# Altium PCB PCB1.PcbDoc
Units mm, origin at the board's own origin, x right, y up, seen from the top; angles counter-clockwise.
Board outline 50.81 x 50.81 mm, 2 copper layers (Top Layer, Bottom Layer); 55 components, 53 nets, 231 pads, 76 vias.
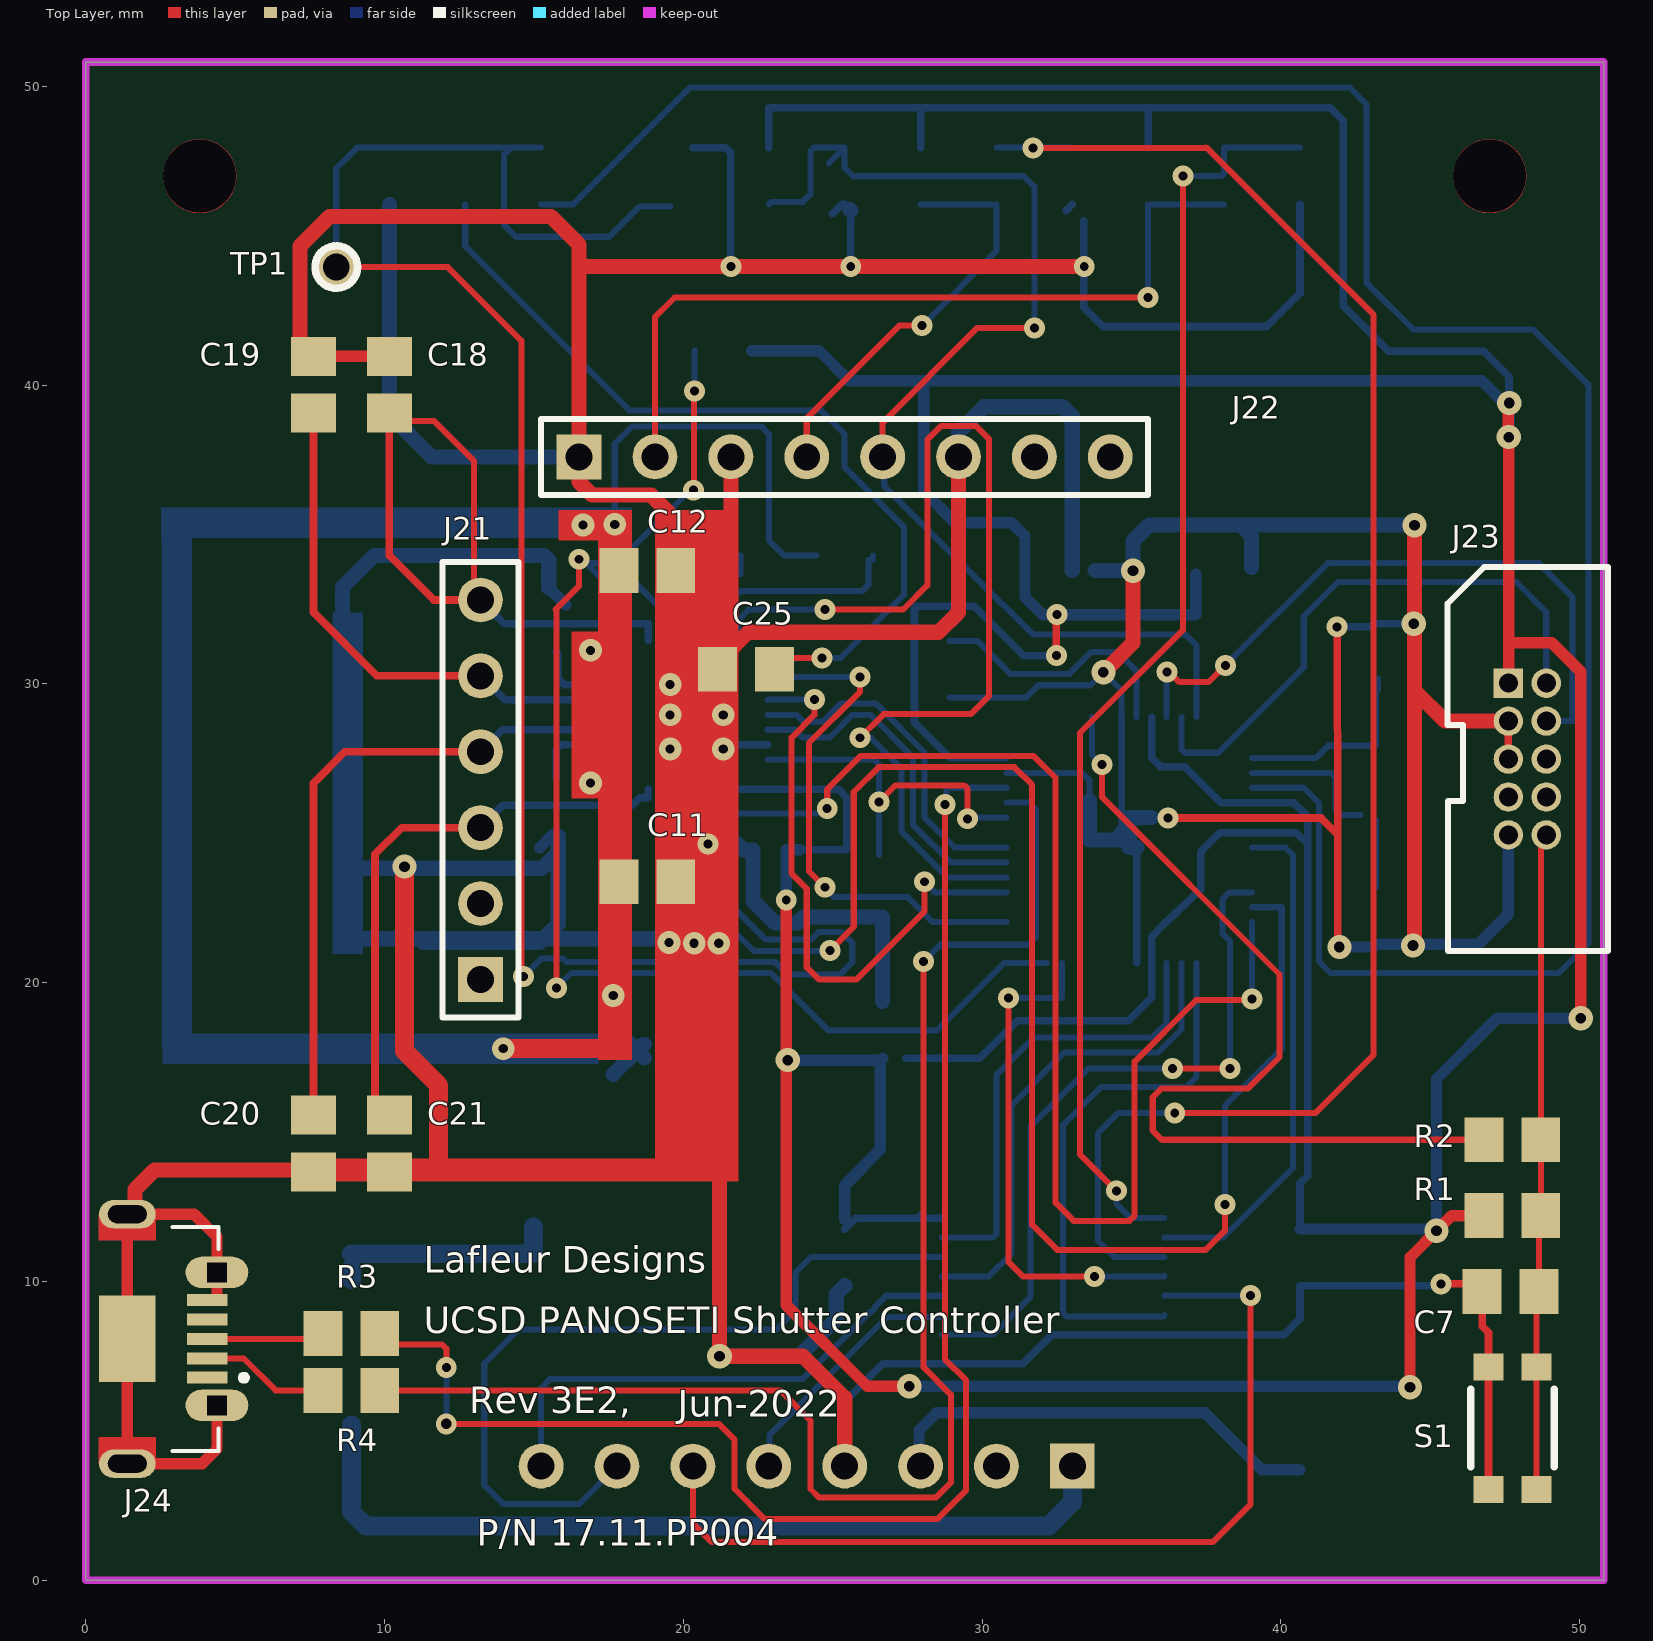
[diagram p0: Top Layer view]
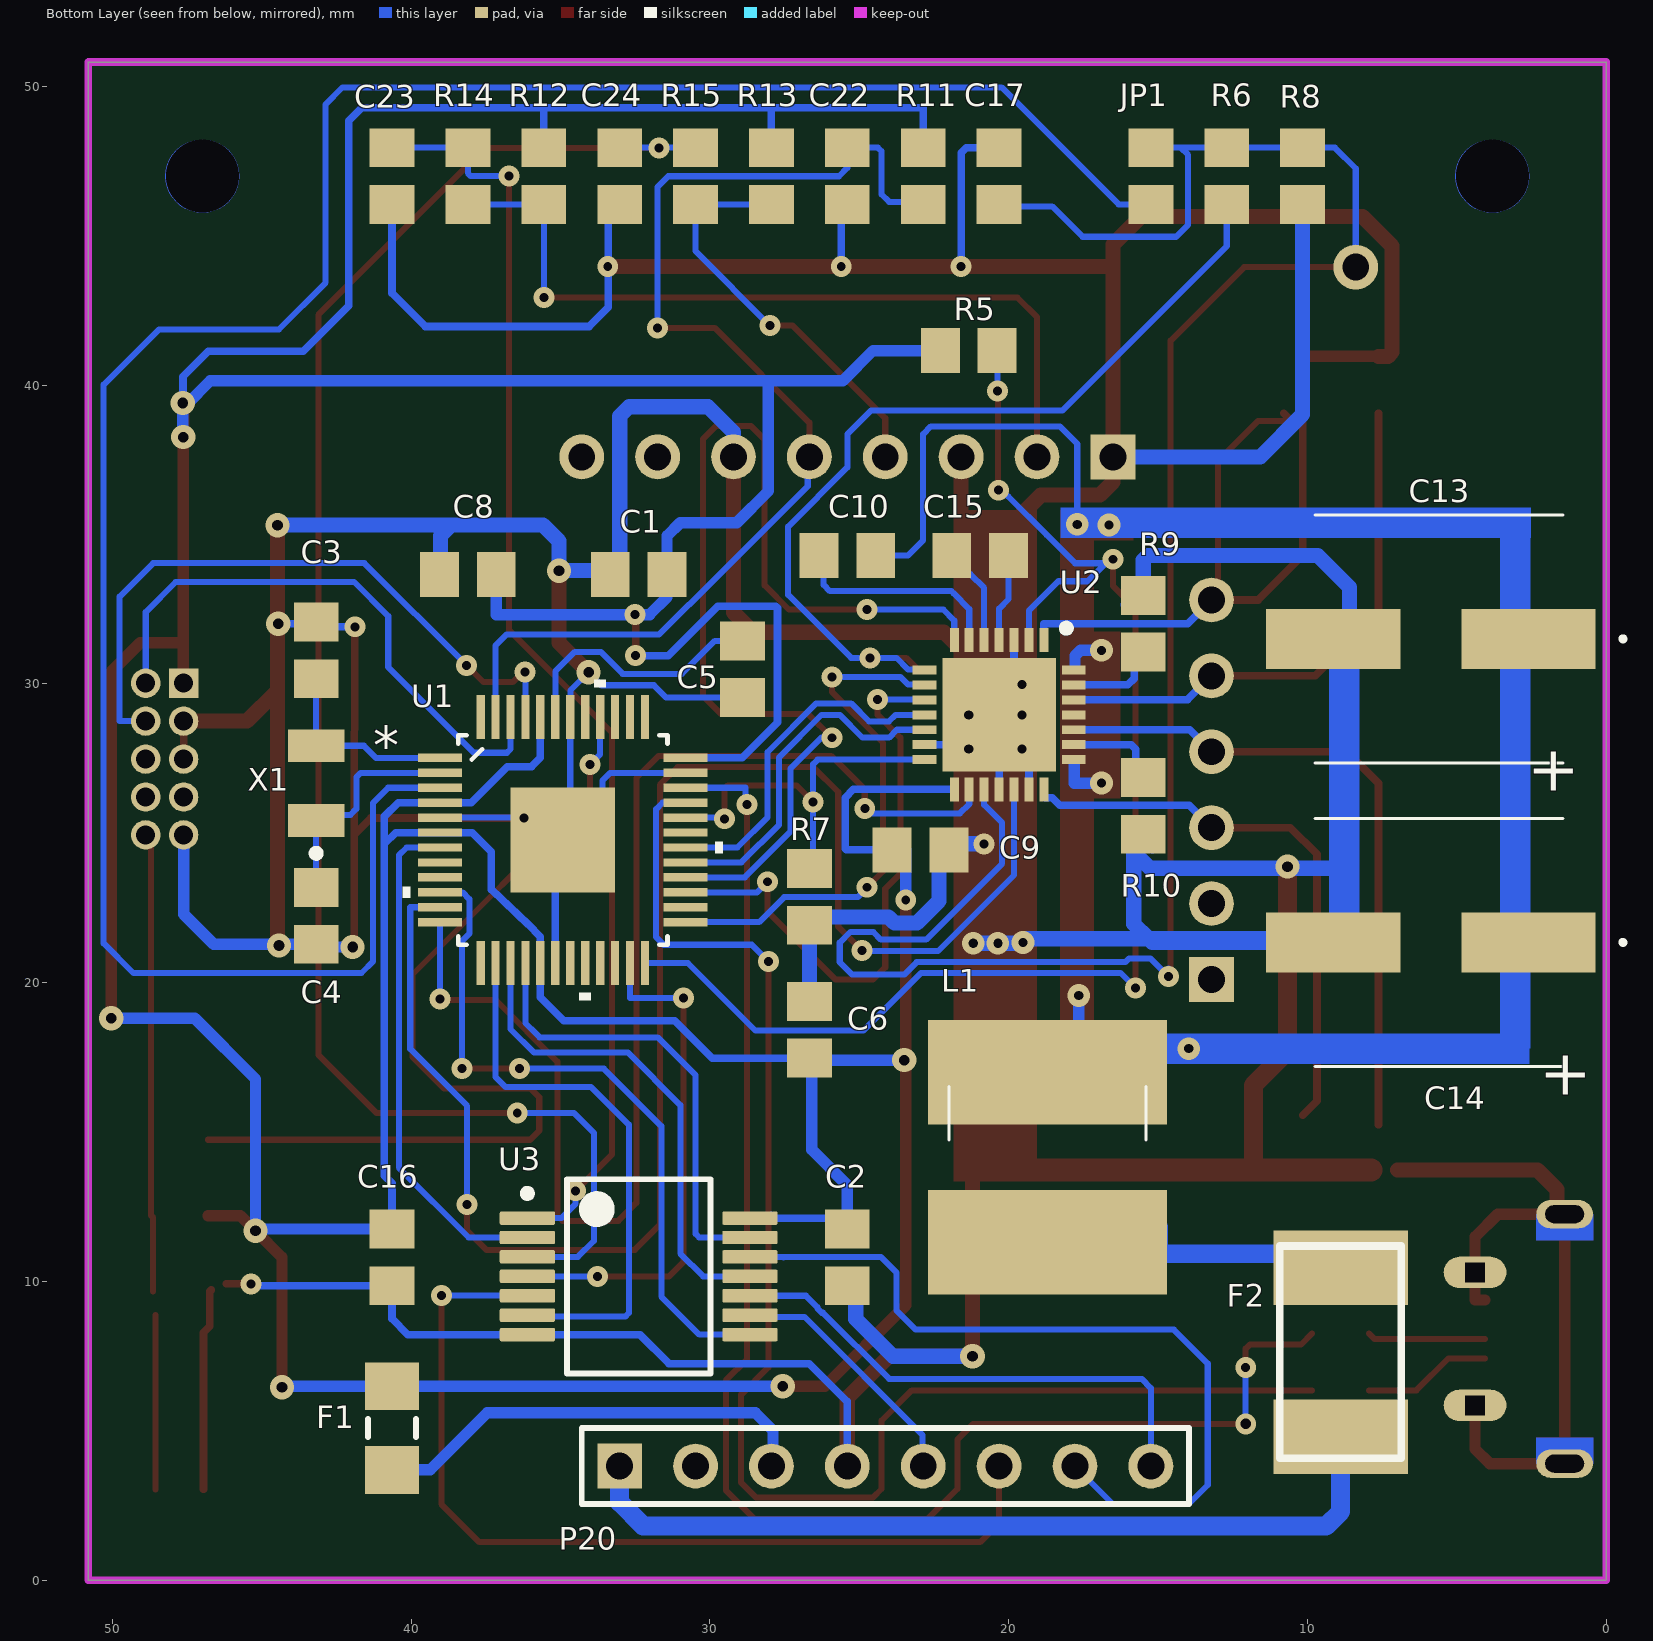
[diagram p1: Bottom Layer view, seen from below]

## Layer stack, top to bottom
Top Solder: solder mask 0.0102, Solder Resist, Dk 3.5
Top Layer: signal copper 0.0356
Dielectric 1: dielectric 0.32, FR-4, Dk 4.8
Bottom Layer: signal copper 0.0356
Bottom Solder: solder mask 0.0102, Solder Resist, Dk 3.5

## Board outline
-0.007,0.006 ccw(c0,0.006) 0,0 50.8,0 ccw(c50.8,0.006) 50.807,0.006 50.807,50.806 ccw(c50.8,50.806) 50.8,50.813 0,50.813 ccw(c0,50.806) -0.007,50.806

## Design rules (kind name [scope] priority, off if disabled: settings)
Clearance [All] p1: gap=0.152 ignorepadtopadclearanceinfootprint=TRUE except(0: Arc-Hole Track-Hole SMDPad-Hole THPad-Hole Via-Hole Fill-Hole Poly-Hole Region-Hole Text-Hole)
ComponentClearance [All] p1: gap=0.051 collisioncheckmode=3 verticalgap=0.051 showdistances=TRUE
HoleSize [All] p1: absolutevalues=TRUE maxlimit=4 minlimit=0.3 maxpercent=80.000 minpercent=20.000
HoleToHoleClearance [All] p1: gap=0.102 allowstackedmicrovias=TRUE
MinimumAnnularRing [All] p1: minimumring=0.152
MinimumSolderMaskSliver [All] p1: minsoldermaskwidth=0.076
PolygonConnect [All] p1: connectstyle=Relief reliefconductorwidth=0.254 reliefentries=4 polygonreliefangle="90 Angle" airgapwidth=0.254
RoutingPriority RoutingPriority_2 [All] p1: routingpriority=3
RoutingPriority RoutingPriority_1 [InNet('GND')] p2: routingpriority=3
RoutingPriority [InNet('+3.3V')] p3: routingpriority=2
RoutingVias [All] p1: holewidth=0.254 width=0.559 viastyle="Through Hole" minholewidth=0.254 minwidth=0.559 maxholewidth=0.711 maxwidth=1.27
SilkToSilkClearance [All] p1: silktosilkclearance=0.051
SilkToSolderMaskClearance [IsPad] p1: minsilkscreentomaskgap=0.152 clearancetoexposedcopper=TRUE
SolderMaskExpansion [All] p1: expansion=0.102
Width GND [InNet('GND')] p1: maxlimit=2.54 minlimit=0.152 preferedwidth=0.508
Width +3.3v [InNet('+3.3V')] p2: maxlimit=0.508 minlimit=0.203 preferedwidth=0.381
Width C10-2(24V) [InNet('NetC10_2')] p3: maxlimit=2.54 minlimit=0.203 preferedwidth=0.508
Width Routing [All] p4: maxlimit=0.762 minlimit=0.203 preferedwidth=0.203
23 further rules are at their usual default settings.

## Classes and differential pairs
component class Sheet2: C9 C10 C11 C12 C13 C14 C15 C16 C17 C18 C19 C20 C21 C22 C23 C24 C25 F2 J21 J22 JP1 L1 P20 R5 R6 R7 R8 R9 R10 R11 R12 R13 R14 R15 TP1 U2 U3
component class Sheet1: C1 C2 C3 C4 C5 C6 C7 C8 F1 J23 J24 R1 R2 R3 R4 S1 U1 X1

## Components (designator, comment, footprint, x,y, rotation, side; value= is the part's Value field where it differs from the comment)
C1 "10uf" 6-0805 32.385,33.661 r0 bottom
C2 ".1uf" 6-0805 25.4,10.801 r270 bottom
C3 "12PF" 6-0805 43.18,31.121 r90 bottom locked
C4 "12PF" 6-0805 43.18,22.231 r270 bottom locked
C5 "1uf" 6-0805 28.905,30.486 r270 bottom
C6 ".1uf" 6-0805 26.67,18.421 r90 bottom
C7 "1uf" 6-0805 47.686,9.658 r180 top
C8 ".1uf" 6-0805 38.1,33.661 r0 bottom
C9 ".1uf" 6-0805 22.951,24.441 r180 bottom
C10 ".1uf" 6-0805 25.4,34.296 r180 bottom
C11 ".1uf" 6-0805 18.796,23.374 r0 top
C12 ".1uf" 6-0805 18.796,33.788 r0 top locked
C13 "100uf" SMD_Lytic_F 5.588,31.502 r0 bottom locked
C14 "100uf" SMD_Lytic_F 5.588,21.342 r0 bottom locked
C15 ".022uf" 6-0805 20.955,34.296 r0 bottom
C16 ".1uf" 6-0805 40.64,10.801 r90 bottom
C17 "1uf" 6-0805 20.32,46.996 r90 bottom
C18 "470pf" 6-0805 10.16,40.011 r90 top
C19 "470pf" 6-0805 7.62,40.011 r90 top
C20 "470pf" 6-0805 7.62,14.611 r270 top
C21 "470pf" 6-0805 10.16,14.611 r270 top
C22 ".1uf" 6-0805 25.4,46.996 r90 bottom
C23 ".1uf" 6-0805 40.64,46.996 r90 bottom
C24 ".1uf" 6-0805 33.02,46.996 r90 bottom
C25 "4.7uf" 6-0805 22.098,30.486 r180 top
F1 "Poly Fuse 250ma" 8-1206 40.64,5.086 r270 bottom
F2 "Poly Fuse 750ma" "PTC 2016L" 8.89,7.626 r90 bottom locked
J21 "Molex 705530110" HDR1X6 13.21,20.106 r90 top locked
J22 "Molex 705530112" HDR1X8 16.51,37.596 r0 top locked
J23 "3220-10-0100-00" SHDR10W41P127_2X5_1265X510X565P 47.615,30.021 r270 top locked
J24 "Molex 47590-0001" "Molex 47590-0001" 2.889,8.073 r270 top locked
JP1 "NU" 6-0805 15.24,46.996 r270 bottom
L1 "MSS7341S" MSS7341502NLD 18.694,15.627 r0 bottom locked value=Value
P20 "Molex 9014-71108" HDR1X8 33.02,3.816 r180 bottom locked
R1 "10k" 6-0805 47.752,12.198 r0 top
R2 "330" 6-0805 47.752,14.738 r0 top
R3 "22" 6-0805 8.89,8.255 r0 top
R4 "22" 6-0805 8.89,6.35 r0 top
R5 "10k" 6-0805 21.336,41.154 r180 bottom
R6 "10k 1%" 6-0805 12.7,46.996 r90 bottom
R7 "NU" 6-0805 26.67,22.866 r270 bottom
R8 "10k 1%" 6-0805 10.16,46.996 r270 bottom
R9 "0.56r 0805" 6-0805 15.494,32.01 r90 bottom locked
R10 "0.56r 0805" 6-0805 15.494,25.914 r270 bottom locked
R11 "180k" 6-0805 22.86,46.996 r270 bottom
R12 "10k" 6-0805 35.56,46.996 r270 bottom
R13 "10k" 6-0805 27.94,46.996 r270 bottom
R14 "10k" 6-0805 38.1,46.996 r90 bottom
R15 "10k" 6-0805 30.48,46.996 r90 bottom
S1 "Reset" KMR_2 47.752,5.086 r90 top
TP1 "TestPoint" "Test Point-Thru-Hole" 8.382,43.948 r0 top
U1 "ATSAMD21G18A-AU" TQFP48_7x7MC 34.925,24.771 r180 bottom locked value=Value
U2 "Part Number: TMC2209-LA-T" QFN50P500X500X90-29N 20.32,28.962 r270 bottom locked value=Value
U3 "SN74LVC14ADBR" DB0014A_M 32.385,10.166 r180 bottom locked
X1 "ABS07-32.768KHz-T" ABRA-ABS07-2_V 43.18,26.676 r90 bottom locked

## Footprints (in the part's own frame and the unit in brackets; to place one, negate y for a bottom-side part, rotate by r counter-clockwise, add the part's x,y. Pads: shape width x height; smd on the part's side, far side on the other; paste and mask are expansions set on the pad)
6-0805 [mm]
  rect 1.3x1.5 smd: 1(-0.95,0) 2(0.95,0)
8-1206 [mm] "Chip Resistor; Body 3.1 x 1.6 mm (LxW typ)"
  rect 1.6x1.8 smd: 1(-1.4,0) 2(1.4,0)
  silkscreen extent -0.3,-0.8 0.3,0.8
ABRA-ABS07-2_V [mm] "Hand Drawn, 2-Leads, Body 3.2x1.5mm, Pitch 2.5mm"
  rect 1.1x1.9 smd: 1(-1.25,0) 2(1.25,0)
  silkscreen extent -2.47,-0.12 -2.23,0.13, body extent -1.6,-0.75 1.6,0.75, height 0.9
DB0014A_M [mm] "SOP, 14-Leads, Body 5.6x6.5mm, Pitch 0.65mm, IPC Low Density"
  rrect22% 1.85x0.45 smd: 1(-3.725,1.95) 2(-3.725,1.3) 3(-3.725,0.65) 4(-3.725,0) 5(-3.725,-0.65) 6(-3.725,-1.3) 7(-3.725,-1.95) 8(3.725,-1.95) 9(3.725,-1.3) 10(3.725,-0.65) 11(3.725,0) 12(3.725,0.65) 13(3.725,1.3) 14(3.725,1.95)
  silkscreen extent -3.85,-3.25 2.4,3.25, body extent -3.91,-3.1 3.91,3.1, height 2
HDR1X6 [mm] "Connector; Header; 6 Position"
  rect 1.5x1.5 hole 0.9: 1(0,0)
  round 1.5 hole 0.9: 2(2.54,0) 3(5.08,0) 4(7.62,0) 5(10.16,0) 6(12.7,0)
  silkscreen extent -1.27,-1.27 13.97,1.27
HDR1X8 [mm] "Connector; Header; 8 Position"
  rect 1.5x1.5 hole 0.9: 1(0,0)
  round 1.5 hole 0.9: 2(2.54,0) 3(5.08,0) 4(7.62,0) 5(10.16,0) 6(12.7,0) 7(15.24,0) 8(17.78,0)
  silkscreen extent -1.27,-1.27 19.05,1.27
KMR_2 [mm]
  rect 0.9x1 smd: 1(-2.05,-0.8) 2(-2.05,0.8) 3(2.05,-0.8) 4(2.05,0.8)
  silkscreen extent -1.3,-1.4 1.3,1.4
"Molex 47590-0001" [mm] "Micro USB AB 5 Pin"
  rect 0.4x1.35 smd: 1(1.3,1.175) 2(0.65,1.175) 3(0,1.175) 4(-0.65,1.175) 5(-1.3,1.175)
  oval 1.05x2.1 hole 0.65 square: SH1(-2.225,1.5) SH2(2.225,1.5)
  oval 0.95x1.9 hole 0.6 slot 1.3 at 90 deg: SH3(-4.175,-1.5) SH4(4.175,-1.5)
  rect 2.9x1.9 smd: SH5(0,-1.5)
  Top Layer region: 4.175,-2.45 3.3,-2.45 3.3,-0.55 4.175,-0.55
  Top Layer region: -3.3,-2.451 -4.177,-2.451 -4.177,-0.55 -3.3,-0.55
  Bottom Layer region: 4.175,-2.451 3.305,-2.451 3.305,-0.55 4.175,-0.55
  Bottom Layer region: -3.3,-2.45 -4.177,-2.45 -4.177,-0.55 -3.3,-0.55
  silkscreen extent -3.75,0 3.75,2.5
MSS7341502NLD [mm]
  rect 8x3.5 smd: 1(0,4.327) 2(0,-1.373)
  silkscreen extent -3.3,-0.9 3.3,0.9
"PTC 2016L" [mm]
  rect 2.5x4.5 smd: 1(-2.826,0) 2(2.824,0)
  silkscreen extent -3.56,-2.03 3.56,2.03
QFN50P500X500X90-29N [mm]
  rect 0.8x0.3 smd: 1(-2.5,1.5) 2(-2.5,1) 3(-2.5,0.5) 4(-2.5,0) 5(-2.5,-0.5) 6(-2.5,-1) 7(-2.5,-1.5) 15(2.5,-1.5) 16(2.5,-1) 17(2.5,-0.5) 18(2.5,0) 19(2.5,0.5) 20(2.5,1) 21(2.5,1.5)
  rect 0.3x0.8 smd: 8(-1.5,-2.5) 9(-1,-2.5) 10(-0.5,-2.5) 11(0,-2.5) 12(0.5,-2.5) 13(1,-2.5) 14(1.5,-2.5) 22(1.5,2.5) 23(1,2.5) 24(0.5,2.5) 25(0,2.5) 26(-0.5,2.5) 27(-1,2.5) 28(-1.5,2.5)
  rect 3.8x3.8 smd: 29(0,0)
  silkscreen extent -3.02,2.12 -2.78,2.37, body extent -2.55,-2.55 2.55,2.55, height 0.9
SHDR10W41P127_2X5_1265X510X565P [mm]
  rect 0.984x0.984 hole 0.635: 1(0,0)
  round 0.984 hole 0.635: 2(0,1.27) 3(1.27,0) 4(1.27,1.27) 5(2.54,0) 6(2.54,1.27) 7(3.81,0) 8(3.81,1.27) 9(5.08,0) 10(5.08,1.27)
  silkscreen extent -3.88,-2.03 8.96,3.34
SMD_Lytic_F [mm]
  rect 4.5x2 smd: 1(-2.988,0) 2(3.55,0)
  silkscreen extent -6.2,-4.15 4.15,4.15, body extent 0,0 0,0
"Test Point-Thru-Hole" [mm]
  round 1.5 hole 0.9: 1(0,0)
  silkscreen extent -0.71,-0.71 0.71,0.71
TQFP48_7x7MC [mil]
  rect 58x11 smd: 1(-162,108.27) 2(-162,88.58) 3(-162,68.9) 4(-162,49.21) 5(-162,29.53) 6(-162,9.84) 7(-162,-9.84) 8(-162,-29.53) 9(-162,-49.21) 10(-162,-68.9) 11(-162,-88.58) 12(-162,-108.27) 25(162,-108.27) 26(162,-88.58) 27(162,-68.9) 28(162,-49.21) 29(162,-29.53) 30(162,-9.84) 31(162,9.84) 32(162,29.53) 33(162,49.21) 34(162,68.9) 35(162,88.58) 36(162,108.27)
  rect 11x58 smd: 13(-108.27,-162) 14(-88.58,-162) 15(-68.9,-162) 16(-49.21,-162) 17(-29.53,-162) 18(-9.84,-162) 19(9.84,-162) 20(29.53,-162) 21(49.21,-162) 22(68.9,-162) 23(88.58,-162) 24(108.27,-162) 37(108.27,162) 38(88.58,162) 39(68.9,162) 40(49.21,162) 41(29.53,162) 42(9.84,162) 43(-9.84,162) 44(-29.53,162) 45(-49.21,162) 46(-68.9,162) 47(-88.58,162) 48(-108.27,162)
  rect 138x138 smd paste-68.5 mask+0: EPAD(0,0)
  silkscreen extent -211,-211 211,211, body extent 0,0 10,10, height 10

## Part data
C1 C2 C3 C4 C5 C6 C7 C8 C9 C10 C11 C12 C15 C16 C17 C18 C19 C20 C21 C22 C23 C24 C25: library part CAP_2, "Capacitor", Fitted=True
C13 C14: library part EEE-HA1V101UP, "Capacitor Polarised", Manufacturer_Name=Panasonic, Mouser Part Number=667-EEE-HA1V101UP, Arrow Part Number=EEE-HA1V101UP, Arrow Price/Stock=https://www.arrow.com/en/products/eee-ha1v101up/panasonic, Datasheet Link=http://industrial.panasonic.com/cdbs/www-data/pdf/RDE0000/ABA0000C1151.pdf, Height=10mm, Manufacturer_Part_Number=EEE-HA1V101UP, Mouser Price/Stock=https://www.mouser.co.uk/ProductDetail/Panasonic/EEE-HA1V101UP?qs=ECX%252BeLvXSgSV%2Fbj%252B%2FHs12Q%3D%3D
F1 F2: library part "Poly Fuse", "Poly Fuse"
J21: library part "Header 6", "Header, 6-Pin", LatestRevisionDate=17-Jul-2002, LatestRevisionNote="Re-released for DXP Platform.", Publisher="Altium Limited"
J22 P20: library part "Header 8", "Header, 8-Pin", LatestRevisionDate=17-Jul-2002, LatestRevisionNote="Re-released for DXP Platform.", Publisher="Altium Limited"
J23: "Connector", Manufacturer_Name="CNC Tech", Datasheet Link=http://www.cnctech.us/pdfs/3220-XX-0100-00.pdf, Height=5.65mm, Manufacturer_Part_Number=3220-10-0100-00
J24: library part 47590-0001, "USB - micro AB Receptacle Connector 5 Position Surface Mount, Right Angle; Through Hole", Package=None, Availability=Unavailable, MF=Molex, MP=47590-0001, Price=None, SnapEDA_Link=https://www.snapeda.com/parts/47590-0001/Molex/view-part/47491/?ref=snap
JP1 R1 R2 R3 R4 R5 R6 R7 R8 R9 R10 R11 R12 R13 R14 R15: library part ERJ8EN, "Precision Thick Film Chip Resistor, 10 Ohm to 2.2M Ohm Range, 1% Tolerance, 1206 Size, 0.125 W", PackageDocument=Mar-2003, Code_IPC="3216 [1206]", ComponentLink1Description="Manufacturer Link", ComponentLink1URL=http://www.panasonic.com/industrial/components/resistive_products.htm, ComponentLink2Description=Datasheet, ComponentLink2URL=http://www.panasonic.com/industrial/components/pdf/AOA0000CE2.pdf, LatestRevisionDate=19-Mar-2004, LatestRevisionNote="Silkscreen size reduced.", PackageReference=8-1206, Published=17-Dec-2003, Publisher="Altium Limited"
L1: library part SRU1048-101Y, "No Description Available", Built_By=EMA_UL_Team, Copyright="Copyright (C) 2018 Accelerated Designs. All rights reserved", Manufacturer_Part_Number=SRU1048-101Y, Vendor="Bourns Electronics"
S1: library part SW-PB, "Switch", LatestRevisionDate=17-Jul-2002, LatestRevisionNote="Re-released for DXP Platform.", PackageReference=SPST-2, Published=24-Mar-1999, Publisher="Altium Limited"
U1: "No Description Available", Built_By=EMA_Molly, Copyright="Copyright (C) 2018 Accelerated Designs. All rights reserved", Manufacturer_Part_Number=ATSAMD21G18A-AU, RefDes=RefDes, Type=DEV, Vendor=Microchip
U2: library part TMC2209-LA-T, "No Description Available", Copyright="Copyright (C) 2018 Accelerated Designs. All rights reserved", Manufacturer_Part_Number=TMC2209-LA-T, RefDes=RefDes, Type=DEV, Vendor=Trinamic
U3: library part CMP-1615-00327-3, "Hex Schmitt-Trigger Inverter, DB0014A, LARGE T&R", F @ Nom Voltage(Max)(Mhz)=100, Generic Part Number=SN74LVC14A, ICC @ Nom Voltage(Max)(mA)=0.01, Manufacturer="Texas Instruments", Operating Temperature Range(C)="-40 to 125", Rating=Catalog, tpd @ Nom Voltage(Max)(ns)=11,7.8,7.5,6.4, Voltage(Nom)(V)=1.8,2.5,2.7,3.3, Bits(#)=6, Code_JEDEC=MO-150, DatasheetVersion=SCAS285AA, Input Type=CMOS,TTL, Output Drive (IOL/IOH)(Max)(mA)=-24/24, Output Type=CMOS, PackageReference=DB0014A, Schmitt Trigger=Yes, Technology Family=LVC, VCC(Max)(V)=3.6, VCC(Min)(V)=2
X1: library part CMP-0447-00001-2, "Crystal, 32.768 kHz, 12.5 pF, -40 to 85 degC, SMD Low Profile 3.2 x 1.5 x 0.9 mm, Tape and Reel", Equivalent Series Resistance (R1)="70 Kohm", Frequency="32.768 kHz", Frequency Tolerance @+25degC="+/- 20 ppm", Insulation Resistance (Min)="500 Mohm", Load Capacitance (CL)="12.5 pF", Manufacturer=Abracon, Operating Temperature="-40 to 85 degC", Q Value (Type)=30000, Shunt Capacitance (C0)="0.9 to 1.2 pF", ComponentLink1Description="Manufacturer URL", ComponentLink1URL=http://www.abracon.com/, ComponentLink2Description=Datasheet, ComponentLink2URL=http://www.abracon.com/Resonators/ABS07.pdf, ComponentLink3Description="Package Specification", ComponentLink3URL=http://www.abracon.com/Resonators/ABS07.pdf, DatasheetVersion=04.03.13, Drive Level (Type)="0.1 uW", Mounting Technology="Surface Mount", Operation Mode="Flexural Mode (Tuning Fork)", PackageDescription="2-Pin Hand Drawn, Body 3.2x1.5mm, Pitch 2.5mm", PackageReference=ABS07-2, Packing="Tape and Reel", PartNumber=ABS07-32.768KHz-T

## Free pads (board coordinates)
  round 1.524 hole 2.44 unplated: 5(3.81,46.996) 5(46.99,46.996)

## Via types
v1: diameter 0.7, hole 0.3, Top Layer to Bottom Layer, 46 vias
v2: diameter 0.762, hole 0.305, Top Layer to Bottom Layer, 14 vias
v3: diameter 0.813, hole 0.356, Top Layer to Bottom Layer, 14 vias
v4: diameter 0.833, hole 0.356, Top Layer to Bottom Layer, 1 vias
v5: diameter 0.7, hole 0.35, Top Layer to Bottom Layer, 1 vias

## Nets (pads, with @x,y where several pads share a name; then routed paths per layer and width w, separated by ;. In a path a pad name is that pad's centre, name@x,y a point inside that pad or via, vN(x,y) a via of type N, cw(c..) or ccw(c..) an arc to the next point about the centre after c; other vN are vias at no path point)
+3.3V: C1.1 C2.1 C6.1 C8.1 C9.1 C16.2 F1.1 J23.1 R1.1 R5.1 R11.1 R12.1 R13.1 U1.4 U1.6 U1.17 U1.36 U1.44 U2.15 U3.14 | length 239.1
  Top Layer w0.254: v1(32.487,30.944) v1@32.487,32.29
  Top Layer w0.381: v1(23.444,22.758) 23.444,9.201 26.162,6.483 v3(27.559,6.483) ; v1@32.487,32.29 v1(32.512,32.315) ; v3(44.323,6.458) 44.323,10.801 v3(45.212,11.69) 45.72,12.198 R1.1 ; J23.1 47.625,30.031 v3(47.625,38.259) 47.615,38.269 47.615,39.37 v3(47.644,39.399) ; 47.676,31.375 49.066,31.375 50.038,30.404 v3(50.038,18.802)
  Bottom Layer w0.254: U2.15@21.82,26.467 25.197,26.467 25.476,26.187 25.476,24.479 25.438,24.441 C9.1 ; R11.1 22.86,49.282 27.94,49.282 ; C2.1 25.765,12.116 U3.14@28.038,12.116 ; 27.445,17.471 29.917,17.471 31.172,18.726 34.894,18.726 35.675,19.507 U1.17 35.675,21.539 36.081,21.946 37.313,23.114 37.313,24.384 37.95,25.021 U1.6 40.517,25.021 40.894,24.644 ; U3.14@27.94,12.214 U3.14@28.038,12.116 ; R13.1 27.94,49.282 ; U3.14 U3.14@28.038,12.116 ; U1.36 28.924,27.521 27.737,28.708 27.737,32.538 27.793,32.595 29.743,32.595 31.394,30.944 v1(32.487,30.944) ; R12.1 35.56,49.257 ; U1.44 35.675,27.527 35.973,27.229 36.786,27.229 37.993,26.021 U1.4 40.431,26.021 40.894,25.559 40.894,24.644 ; C16.2 40.64,13.284 40.894,13.538 40.894,24.644 ; v3@47.615,39.37 47.638,39.393 47.638,40.278 46.787,41.129 43.612,41.129 42.088,42.653 42.088,48.851 41.656,49.282 27.94,49.282
  Bottom Layer w0.381: R5.1 24.536,41.154 25.552,40.138 28.042,40.138 ; v1@23.444,22.866 23.444,24.441 C9.1 ; v3@23.764,17.405 C6.1@26.604,17.405 ; C2.1@25.4,12.071 25.4,13.214 26.594,14.408 26.594,17.395 C6.1@26.604,17.405 ; C6.1 C6.1@26.604,17.405 ; v3(27.559,6.483) 27.686,6.483 27.689,6.486 F1.1 v3@44.323,6.486 ; v1@32.423,32.226 v1(32.512,32.315) ; C8.1 37.15,32.315 v1(32.512,32.315) ; C16.2 v3@45.212,11.751 ; v3(45.212,11.69) v3@45.212,11.751 ; v3@47.615,39.37 47.498,39.37 46.73,40.138 28.042,40.138 ; v3(47.625,38.259) 47.644,38.278 v3(47.644,39.399) ; v3(50.038,18.802) 47.244,18.802 45.212,16.77 v3@45.212,11.751 ; 28.042,40.138 28.042,36.455 29.105,35.392 30.993,35.392 31.435,34.95 C1.1 31.435,32.898 32.018,32.315 v1(32.512,32.315)
  other v3: 23.495,17.405
GND: C1.2 C2.2 C3.2 C4.2 C5.2 C6.2 C7.2 C8.2 C9.2 C11.2 C12.2 C13.2 C14.2 C16.1 C17.2 C18.2 C19.2 C20.2 C21.2 C22.1 C23.1 C24.1 C25.2 J22.1 J22.3 J22.6 J23.3 J23.5 J23.9 J24.5 J24.SH1 J24.SH2 J24.SH3 J24.SH4 J24.SH5 P20.4 R7.2 R8.2 R9.2 R10.2 S1.2 S1.4 U1.5 U1.18 U1.35 U1.42 U1.EPAD U2.3 U2.13 U2.18 U2.20 U2.29 U3.7 | length 390.9
  Top Layer w0.203: v3@41.91,21.241 v3(41.961,21.19)
  Top Layer w0.254: v1(36.22,25.508) 41.351,25.508 41.91,24.949 ; v1(41.885,31.909) 41.91,24.949 ; v3@41.91,21.241 41.91,24.949 ; v1(45.364,9.912) C7.2@46.184,9.912 ; C7.2@46.685,9.709 C7.2 46.736,8.496 46.952,8.28 S1.4 S1.2 ; J23.5 J23.3
  Top Layer w0.381: J24.SH3@1.641,12.5 J24.SH3 ; J24.5 4.379,9.373 4.389,9.382 J24.SH1 4.389,11.486 3.627,12.248 J24.SH3 ; J24.SH2 4.389,4.389 3.898,3.898 J24.SH4 J24.SH5 J24.SH3 ; C19.2 C18.2
  Top Layer w0.508: J24.SH3@1.641,12.5 1.641,13.071 2.292,13.722 3.556,13.722 C20.2@6.985,13.722 ; C19.2 7.305,40.961 7.163,41.104 7.163,44.653 8.153,45.644 15.57,45.644 16.51,44.704 16.51,43.967 ; 19.304,14.611 19.558,14.865 19.558,14.63 ; 19.558,16.77 v2(19.558,27.819) v2(19.558,28.962) ; v2(19.558,29.978) 19.558,35.687 18.923,36.322 16.942,36.322 16.51,36.754 J22.1 16.51,43.967 ; v2(21.336,28.962) v2(21.336,27.819) 21.082,27.565 21.209,27.438 v4(21.209,7.493) 24.009,7.493 25.4,6.102 P20.4 ; C25.2@21.336,29.978 21.336,30.886 22.174,31.725 28.543,31.725 29.21,32.391 J22.6 ; 21.59,35.566 21.59,37.344 J22.3 ; v1(33.42,43.967) v1(21.59,43.967) 16.51,43.967 ; v3(34.061,30.385) 35.052,31.375 v3(35.052,33.788) ; v3(44.425,21.241) 44.475,21.292 44.475,29.767 ; v3(44.475,35.312) 44.475,29.767 ; J23.3 45.491,28.751 44.501,29.742 44.475,29.767
  Top Layer w0.635: v3(10.668,23.882) 10.668,17.703 11.811,16.56 11.811,13.716
  Top Layer w0.762: C20.2@7.874,13.722 19.05,13.722
  Bottom Layer w0.203: C5.2 31.46,29.536 31.877,29.953 33.63,29.953 v3(34.061,30.385) 34.667,29.779 34.667,28.894 U1.42 U1.EPAD@34.675,25.021 ; U1.35 33.335,27.021 33.601,26.756 U1.EPAD@33.601,26.096 ; U1.EPAD@35.675,25.521 U1.5 ; C3.2@43.017,31.909 C3.2 C3.2@43.241,32.01
  Bottom Layer w0.254: U2.20 19.32,27.962 U2.29 ; U2.3 19.82,29.462 U2.29 ; U2.18 U2.29 ; C17.2 21.412,47.946 21.59,47.769 v1(21.59,43.967) ; v2(21.336,27.819) 21.479,27.962 U2.13 ; C22.1@24.994,45.74 25.3,46.046 C22.1 C22.1@25.578,45.869 ; P20.4 25.4,5.975 26.67,7.245 31.369,7.245 32.34,8.216 40.107,8.216 40.64,8.75 C16.1 45.364,9.851 v1(45.364,9.912) ; v1(25.603,43.974) C22.1@25.603,45.843 ; C24.1@32.817,45.843 C24.1 ; C24.1@33.401,45.498 33.401,42.602 34.042,41.961 39.522,41.961 40.64,43.078 C23.1 ; U1.18 U1.EPAD@35.175,24.521 ; v1(41.885,31.909) C3.2@43.017,31.909 ; C3.2@43.241,32.01 v3(44.45,32.01)
  Bottom Layer w0.381: R10.2@15.188,24.505 15.648,24.964 15.748,24.964 R10.2@15.814,24.898 ; R9.2@15.494,33.214 R9.2@16.063,32.645 ; v3(41.961,21.19) 43.089,21.19 C4.2 46.609,21.281 47.615,22.287 J23.9
  Bottom Layer w0.508: C14.2@8.588,21.469 15.322,21.469 ; C13.2@8.588,31.502 8.588,33.232 9.652,34.296 15.345,34.296 15.494,34.148 R9.2@15.494,33.214 ; 8.89,23.952 9.017,23.825 15.265,23.825 R10.2@15.814,24.374 ; R8.2 10.16,39.014 11.578,37.596 J22.1 ; C14.2@11.297,21.336 15.183,21.336 15.19,21.342 15.195,21.342 15.322,21.469 ; R10.2@15.814,24.898 R10.2@15.814,24.374 ; v1(20.828,24.644) 21.798,24.644 C9.2 22.327,24.441 22.327,22.733 23.063,21.996 23.818,21.996 24.021,22.2 26.67,22.2 R7.2 C6.2 ; v2(21.184,21.317) v2(20.363,21.317) 19.543,21.317 v2(19.517,21.342) 19.475,21.469 15.322,21.469 ; v4(21.209,7.493) 23.876,7.493 25.12,8.737 25.12,9.571 C2.2 ; C22.1@25.578,45.869 C22.1@25.603,45.843 ; J22.6 29.21,38.423 30.062,39.275 32.703,39.275 33.02,38.958 C1.2@33.02,33.788 ; U1.EPAD@33.601,26.096 33.601,24.771 U1.EPAD ; C1.2@33.782,33.788 v3(35.052,33.788) 35.052,34.779 35.585,35.312 38.659,35.312 ; U1.EPAD@34.675,25.021 U1.EPAD@34.925,25.021 ; U1.EPAD@35.175,24.521 34.925,24.521 U1.EPAD ; U1.EPAD@35.675,25.521 34.925,25.521 U1.EPAD@34.925,25.021 ; C8.2@39.014,33.89 39.014,34.957 38.659,35.312 ; v3(44.475,35.312) 38.659,35.312 ; 15.322,21.469 15.814,21.962 R10.2@15.814,24.374 ; U1.EPAD U1.EPAD@34.925,25.021
NetC3_1: C3.1 U1.1 X1.2 | length 6.7
  Bottom Layer w0.203: U1.1 41.18,27.521 41.585,27.926 X1.2 43.18,29.79 43.256,29.79 43.256,30.171 C3.1
NetC4_1: C4.1 U1.2 X1.1 | length 7.1
  Bottom Layer w0.203: U1.2 41.082,27.021 41.692,27.021 41.834,26.88 41.834,25.813 42.037,25.61 X1.1@42.672,25.61 ; C4.1 X1.1
NetC5_1: C5.1 U1.43 | length 8.8
  Bottom Layer w0.203: C5.1 29.835,31.436 30.937,30.334 32.918,30.334 33.655,31.071 34.519,31.071 35.175,30.414 U1.43
NetC7_1: C7.1 J23.10 R1.2 R2.2 S1.1 S1.3 | length 21.3
  Top Layer w0.203: S1.1 S1.3 48.552,8.872 ; C7.1 48.636,12.139 R1.2 R2.2 48.702,24.941 J23.10
NetC10_1: C10.1 U2.6 | length 7.4
  Bottom Layer w0.203: U2.6 21.32,32.502 21.844,33.026 21.92,33.103 25.984,33.103 26.196,33.314 26.196,34.142 26.35,34.142 C10.1
NetC10_2: C10.2 C11.1 C12.1 C13.1 C14.1 L1.2 U2.22 U2.28 | length 28.9
  Top Layer w0.381: v2(16.891,31.121) 17.653,31.121
  Top Layer w0.635: v2(13.97,17.786) 17.399,17.786
  Bottom Layer w0.203: v2@17.741,35.3 v2(17.704,35.338) 17.704,38.03 18.288,38.614 22.606,38.614 22.86,38.36 22.86,34.804 23.368,34.296 C10.2
  Bottom Layer w0.381: v2(16.891,26.676) 17.8,26.676 17.8,27.311 ; v2@16.964,31.048 v2(16.891,31.121) 17.597,31.121 17.78,30.938 17.78,30.613 ; L1.2@17.653,18.328 v2(17.653,19.564)
  Bottom Layer w0.508: v2(13.97,17.786) 17.111,17.786 17.653,18.328 17.78,18.455 17.952,18.212 L1.2@18.443,17.721 ; L1.2@17.653,16.931 L1.2@18.443,17.721 ; L1.2@18.694,17.47 L1.2@18.443,17.721 ; L1.2@18.694,17.927 18.649,17.927 L1.2@18.443,17.721
  other v2: 16.637,35.312
NetC15_1: C15.1 U2.4 | length 3
  Bottom Layer w0.203: C15.1 20.005,32.833 20.32,32.518 U2.4
NetC15_2: C15.2 U2.5 | length 3.6
  Bottom Layer w0.203: U2.5 20.82,33.211 21.282,33.673 21.905,33.673 C15.2
NetC17_1: C17.1 JP1.1 R6.2 R8.1 TP1.1 U2.17 | length 70.3
  Top Layer w0.203: TP1.1 12.116,43.948 14.58,41.485 14.58,20.069 14.656,19.992 v1(14.656,20.204)
  Bottom Layer w0.203: TP1.1 8.382,47.25 9.078,47.946 R8.1 R6.2 14.236,47.946 ; v1@14.656,20.463 v1(14.656,20.204) 15.261,20.809 15.965,20.809 16.092,20.682 23.077,20.682 23.484,20.276 25.248,20.276 25.654,20.682 25.654,21.336 25.298,21.692 24.529,21.692 24.275,21.438 22.765,21.438 20.218,23.984 20.218,25.349 20.82,25.951 U2.17 ; JP1.1 14.236,47.946 ; 19.564,45.98 18.542,45.98 17.526,44.964 14.395,44.964 13.995,45.364 13.995,47.706 14.236,47.946
NetC18_1: C18.1 J21.6 U2.1 | length 23.2
  Top Layer w0.203: C18.1@10.16,38.741 C18.1 ; C18.1@10.527,38.794 11.659,38.794 12.99,37.462 J21.6@12.99,33.026
  Top Layer w0.254: C18.1@10.16,38.741 10.16,34.296 11.65,32.806 J21.6 J21.6@12.99,33.026 ; C18.1@10.527,38.794 C18.1@10.795,39.061
  Bottom Layer w0.254: J21.6@13.277,32.874 J21.6 14.006,32.01 18.82,32.01 U2.1
NetC19_1: C19.1 J21.5 U2.26 | length 18.1
  Top Layer w0.254: C19.1 7.62,32.391 9.745,30.266 J21.5
  Bottom Layer w0.254: J21.5 14.014,29.462 U2.26
NetC20_1: C20.1 J21.4 U2.24 | length 22.4
  Top Layer w0.254: C20.1@7.62,15.246 C20.1 7.62,26.676 8.67,27.726 J21.4
  Bottom Layer w0.254: J21.4 13.946,28.462 U2.24
NetC21_1: C21.1 J21.3 U2.21 | length 19.1
  Top Layer w0.254: C21.1 9.677,16.044 9.677,24.289 10.575,25.186 J21.3
  Bottom Layer w0.254: J21.3 13.959,25.935 18.293,25.935 18.547,26.189 18.797,26.189 18.82,26.212 U2.21
NetC22_2: C22.2 J22.5 R11.2 U1.47 | length 40.5
  Top Layer w0.203: J22.5 26.67,38.741 29.845,41.916 v1(31.75,41.916)
  Bottom Layer w0.203: R11.2 22.946,46.133 24.003,46.133 24.257,46.387 24.257,47.827 24.376,47.946 C22.2 ; C22.2@24.873,47.419 C22.2 ; J22.5 26.725,37.542 26.725,36.612 30.68,32.657 30.697,32.657 31.699,31.655 36.805,31.655 37.175,31.284 U1.47 ; v1(31.75,41.916) 31.75,46.634 31.394,46.99 25.679,46.99 25.4,47.269 C22.2
NetC23_2: C23.2 R14.2 U3.1 | length 43
  Top Layer w0.203: v1(34.493,13.03) 33.274,14.249 33.274,28.353 36.728,31.807 v1(36.728,46.996)
  Bottom Layer w0.203: v1(34.493,13.03) 34.493,12.598 34.975,12.116 U3.1 ; v1(36.728,46.996) 38.005,46.996 38.1,47.092 R14.2 C23.2
NetC24_2: C24.2 R15.2 U3.3 | length 57.6
  Top Layer w0.203: v1(31.699,47.936) 37.478,47.936 37.497,47.955 43.104,42.348 43.104,17.577 41.154,15.627 v1(36.449,15.627)
  Bottom Layer w0.203: R15.2 v1@31.911,47.946 ; v1(31.699,47.936) 31.901,47.936 v1@31.911,47.946 ; C24.2 v1@31.911,47.946 ; U3.3 34.417,10.816 33.884,11.35 33.884,14.967 34.544,15.627 v1(36.449,15.627)
NetC25_1: C25.1 R6.1 U2.8 | length 30
  Top Layer w0.203: C25.1 23.429,30.867 v1(24.638,30.867) v1@24.638,30.809
  Bottom Layer w0.203: R6.1 12.7,44.652 18.204,39.148 24.613,39.148 25.4,38.36 25.4,37.243 27.381,35.262 27.381,32.976 25.273,30.867 v1(24.638,30.867) 23.754,30.867 23.373,30.486 U2.8@23.114,30.486
NetF1_2: F1.2 P20.3 | length 14.7
  Bottom Layer w0.381: P20.3@27.889,4.045 27.889,5.01 28.473,5.594 37.459,5.594 39.367,3.686 F1.2
NetF2_1: F2.1 P20.1 | length 28.8
  Bottom Layer w0.635: F2.1@8.89,5.188 8.89,2.292 9.373,1.81 32.233,1.81 33.02,2.597 P20.1
NetF2_2: F2.2 L1.1 | length 7.4
  Bottom Layer w0.635: F2.2@8.89,10.065 F2.2 ; F2.2@8.89,10.922 14.986,10.922 L1.1@14.986,11.811
NetJ22_2: J22.2 R12.2 R14.1 | length 27.1
  Top Layer w0.203: J22.2 19.05,42.272 19.704,42.926 v1(35.56,42.926)
  Bottom Layer w0.203: v1(35.56,42.926) R12.2 R14.1
NetJ22_4: J22.4 R13.2 R15.1 | length 14.1
  Top Layer w0.203: J22.4 24.13,38.894 27.229,41.993 v1(27.991,41.993)
  Bottom Layer w0.203: R13.2 R15.1 30.48,44.482 v1(27.991,41.993)
NetJ23_2: J23.2 U1.46 | length 19.5
  Bottom Layer w0.203: U1.46 36.675,27.811 36.794,27.692 37.903,27.692 40.767,30.556 40.767,32.264 41.91,33.407 47.879,33.407 48.885,32.401 J23.2
NetJ23_4: J23.4 U1.45 | length 22.5
  Top Layer w0.203: v1(36.195,30.39) 36.269,30.39 36.604,30.055 37.579,30.055 v1(38.144,30.62)
  Bottom Layer w0.203: U1.45 36.175,30.116 36.322,30.263 v1(36.195,30.39) ; v1(38.144,30.62) 41.567,34.042 48.635,34.042 49.759,32.918 49.759,28.751 J23.4
NetJ24_2: J24.2 R4.1 | length 4.3
  Top Layer w0.203: J24.2 5.277,7.423 6.35,6.35 R4.1
NetJ24_3: J24.3 R3.1 | length 4
  Top Layer w0.203: J24.3 7.758,8.073 R3.1
NetJP1_2: JP1.2 U1.3 | length 80.3
  Bottom Layer w0.203: JP1.2 16.322,46.046 20.237,49.962 42.297,49.962 42.862,49.397 42.862,43.428 44.425,41.866 48.438,41.866 50.292,40.011 50.292,21.311 49.301,20.32 41.662,20.32 41.275,20.707 41.275,26.016 40.77,26.521 U1.3
NetP20_5: P20.5 U3.9 | length 8.5
  Bottom Layer w0.203: P20.5 22.882,3.838 22.882,4.854 26.834,8.807 28.6,8.807 U3.9
NetP20_6: P20.6 U3.5 | length 31.2
  Top Layer w0.203: P20.6 20.32,1.905 20.955,1.27 37.719,1.27 38.989,2.54 v1(38.989,9.525)
  Bottom Layer w0.203: U3.5 v1(38.989,9.525)
NetP20_7: P20.7 U3.12 | length 26.9
  Bottom Layer w0.203: P20.7 16.51,2.546 13.97,2.546 13.335,3.181 13.335,7.245 14.472,8.382 23.114,8.382 23.749,9.017 23.749,10.287 24.278,10.816 27.508,10.816 ; 27.53,10.795 27.508,10.816 ; U3.12 27.508,10.816
NetP20_8: P20.8 U3.10 | length 17.3
  Bottom Layer w0.203: P20.8 15.24,6.426 15.545,6.731 24.002,6.731 26.218,8.947 26.255,8.947 26.404,9.096 26.404,9.133 26.787,9.516 U3.10
NetR2_1: R2.1 U1.40 | length 31.1
  Top Layer w0.203: v1(34.011,27.305) 34.011,26.213 39.954,20.269 39.954,17.507 38.906,16.459 36.011,16.459 35.712,16.161 35.712,15.043 36.017,14.738 R2.1
  Bottom Layer w0.203: U1.40 33.675,27.641 v1(34.011,27.305)
NetR3_2: R3.2 U1.34 | length 50.9
  Top Layer w0.203: R3.2 10.215,7.88 11.927,7.88 12.065,7.743 v1(12.065,7.112) ; v5(12.065,5.23) 21.186,5.23 21.717,4.699 21.717,3.048 22.727,2.038 28.499,2.038 29.464,3.004 29.464,6.687 28.753,7.398 v1(28.753,25.965) v1@28.73,25.988
  Bottom Layer w0.203: v5(12.065,5.23) v1(12.065,7.112) ; v1(28.753,25.965) 28.753,26.092 28.804,26.143 28.804,26.521 U1.34
NetR4_2: R4.2 U1.33 | length 49.4
  Top Layer w0.203: R4.2 23.241,6.35 24.257,5.334 24.257,3.048 24.536,2.769 28.461,2.769 28.956,3.263 28.956,6.204 28.042,7.118 v1(28.042,20.707)
  Bottom Layer w0.203: v1(28.042,20.707) 28.6,21.266 31.547,21.266 31.801,21.52 31.801,25.806 31.586,26.021 U1.33
NetR5_2: R5.2 U1.24 U2.2 | length 47.3
  Top Layer w0.203: v1(15.748,19.818) 15.748,32.468 15.723,32.493 16.51,33.28 v1(16.51,34.169) ; v1(20.345,36.481) 20.345,36.269 20.354,36.261 20.354,39.791 v1(20.371,39.808) v1@20.354,39.825
  Bottom Layer w0.203: v1(15.748,19.818) 16.256,20.326 22.93,20.326 24.867,18.39 28.473,18.39 30.734,20.65 32.175,20.65 U1.24 ; v1(16.51,34.169) 16.613,34.169 v1@16.746,34.036 ; U2.2 19.32,32.452 19.075,32.696 18.338,33.434 17.348,33.434 v1@16.746,34.036 ; v1(20.345,36.481) 20.229,36.481 20.017,36.269 20.01,36.269 18.731,34.99 17.777,34.036 v1@16.746,34.036 ; v1(20.371,39.808) 20.371,41.139 R5.2
NetR7_1: R7.1 U1.32 U2.14 | length 12.4
  Top Layer w0.203: v1(26.543,26.041) 27.102,26.6 29.396,26.6 29.515,26.481 v1(29.515,25.483)
  Bottom Layer w0.203: U2.14 26.392,27.462 26.543,27.311 v1(26.543,26.041) R7.1@26.543,24.263 ; v1(29.515,25.483) 29.554,25.521 U1.32
NetR9_1: R9.1 U2.27 | length 3
  Bottom Layer w0.254: R9.1@15.748,31.06 15.802,31.006 15.802,30.178 16.018,29.962 U2.27
NetR10_1: R10.1 U2.23 | length 3.1
  Bottom Layer w0.254: R10.1@15.748,26.864 15.748,27.814 15.897,27.962 U2.23
NetU1_7: U1.7 U3.2 | length 17.2
  Bottom Layer w0.203: U3.2 38.075,11.466 40.411,13.803 40.411,24.263 40.153,24.521 U1.7
NetU1_10: U1.10 U3.8 | length 23.5
  Top Layer w0.203: v1(36.373,17.12) v1(38.303,17.12)
  Bottom Layer w0.203: U3.8 30.353,8.216 31.623,9.486 31.623,15.189 33.553,17.12 v1(36.373,17.12) ; v1(38.303,17.12) 38.303,21.387 38.049,21.641 38.049,22.793 38.278,23.021 U1.10
NetU1_11: U1.11 U2.19 | length 55.6
  Top Layer w0.203: v1(24.905,21.069) 25.705,21.869 25.705,26.38 26.535,27.21 31.083,27.21 31.674,26.619 31.674,11.887 32.512,11.049 37.484,11.049 38.125,11.69 v1(38.125,12.573)
  Bottom Layer w0.203: U2.19 19.82,23.595 22.358,21.057 24.892,21.057 v1(24.905,21.069) ; v1(38.125,12.573) 38.125,15.875 40.03,17.78 40.03,22.521 U1.11
NetU1_12: U1.12 U2.16 | length 43
  Top Layer w0.203: v1(24.816,25.832) 24.816,26.467 25.94,27.591 31.718,27.591 32.461,26.848 32.461,12.624 33.064,12.021 34.925,12.021 35.103,12.198 35.103,17.355 37.16,19.412 38.995,19.412 v1(39.04,19.456)
  Bottom Layer w0.203: U2.16 21.32,25.975 21.634,25.66 24.548,25.66 24.72,25.832 v1(24.816,25.832) ; v1(39.04,19.456) U1.12
NetU1_14: U1.14 U3.6 | length 18.7
  Bottom Layer w0.203: U3.6 36.064,8.82 32.834,8.82 32.715,8.939 32.715,15.24 33.985,16.51 36.849,16.51 37.175,16.836 U1.14
NetU1_15: U1.15 U3.11 | length 16.6
  Bottom Layer w0.203: U3.11 30.226,10.166 30.988,10.928 30.988,15.9 32.741,17.653 35.884,17.653 36.675,18.444 U1.15
NetU1_16: U1.16 U3.13 | length 15.6
  Bottom Layer w0.203: U3.13 30.361,11.466 30.48,11.585 30.48,16.897 31.75,18.167 35.695,18.167 35.814,18.286 36.175,18.647 U1.16
NetU1_23: U1.23 U3.4 | length 17.2
  Top Layer w0.203: v1(30.886,19.482) 30.886,10.643 31.363,10.166 v1(33.757,10.166)
  Bottom Layer w0.203: v1(30.886,19.482) 32.675,19.482 U1.23 ; v1(33.757,10.166) 36.059,10.166 36.085,10.192 U3.4
NetU1_25: U1.25 U2.9 | length 17.7
  Top Layer w0.203: v1(24.74,23.19) 24.206,23.724 24.206,28.023 25.908,29.724 v1(25.908,30.232)
  Bottom Layer w0.203: U2.9 22.841,29.984 23.373,29.984 23.622,30.232 v1(25.908,30.232) ; v1(24.74,23.19) 24.74,23.165 25.044,22.86 27.515,22.86 28.353,22.021 U1.25
NetU1_27: U1.27 U2.10 | length 20
  Top Layer w0.203: v1(24.384,29.47) 24.384,28.962 23.622,28.2 23.622,23.647 24.13,23.139 24.13,20.511 24.543,20.098 25.787,20.098 28.067,22.377 v1(28.067,23.374)
  Bottom Layer w0.203: U2.10 22.828,29.47 v1(24.384,29.47) ; v1(28.067,23.374) 28.42,23.021 U1.27
NetU1_28: U1.28 U2.7 | length 36.4
  Top Layer w0.203: v1(24.74,32.487) 27.356,32.487 28.169,33.299 28.169,38.176 28.626,38.633 29.794,38.633 30.226,38.202 30.226,29.591 29.623,28.988 26.706,28.988 v1(25.912,28.194)
  Bottom Layer w0.203: U2.7 21.82,32.116 22.19,32.487 v1(24.74,32.487) ; v1@25.933,28.251 25.912,28.23 v1(25.912,28.194) 26.27,28.194 27.305,27.159 27.305,25.051 28.834,23.521 U1.28
NetU1_29: U1.29 U2.12 | length 11.8
  Bottom Layer w0.203: U2.12 23.741,28.462 24.003,28.2 24.892,28.2 25.654,28.962 26.264,28.962 27.686,27.54 27.686,25.279 28.944,24.021 U1.29
NetU1_30: U1.30 U2.11 | length 11.6
  Bottom Layer w0.203: U2.11 23.784,28.962 24.007,28.739 24.669,28.739 25.273,29.343 26.441,29.343 28.067,27.718 28.067,25.533 29.079,24.521 U1.30
pads on no net: J21.1 J21.2 J22.7 J22.8 J23.6 J23.7 J23.8 J24.1 J24.4 P20.2 U1.8 U1.9 U1.13 U1.19 U1.20 U1.21 U1.22 U1.26 U1.31 U1.37 U1.38 U1.39 U1.41 U1.48 U2.25

## Keep-outs
Keep-Out Layer:
  the board outline again, w0.254

## Other copper
Top Layer:
  region net NetC10_2: 17.272,26.168 17.272,31.756 16.256,31.756 16.256,26.168
  rectangle net NetC10_2: 15.824,34.804 18.288,35.82
  rectangle net NetC10_2: 17.145,17.405 18.288,35.82
  rectangle net GND: 19.05,13.341 21.844,35.82
Bottom Layer:
  region net NetC10_2: 18.263,34.881 18.263,35.897 2.515,35.897 2.515,34.881
  region net NetC10_2: 17.17,17.278 17.17,18.294 2.565,18.294 2.565,17.278
  rectangle net GND: 8.255,20.961 9.271,32.391
  rectangle net NetC10_2: 2.54,17.786 3.556,34.931
Multi-Layer:
  circle w0.013: c46.99,46.996 r1.219
  circle w0.013: c46.99,46.996 r1.219
  circle w0.013: c3.81,46.996 r1.219
  circle w0.013: c3.81,46.996 r1.219

## Silkscreen, mask and mechanical layers (free items; w line width, h text height)
Top Overlay:
  text "Lafleur Designs" at 11.303,10.287 h0.89
  text "UCSD PANOSETI Shutter Controller" at 11.303,8.255 h0.89
  text "Rev 3E2," at 12.827,5.588 h0.89
  text "Jun-2022" at 19.812,5.461 h0.89
  text "P/N 17.11.PP004" at 13.081,1.143 h0.89
Bottom Overlay:
  text "+" at 0.889,26.422 h1.52
  text "+" at 0.483,16.237 h1.52
Mechanical 20:
  circle w0.013: c48.885,24.941 r0.35
  circle w0.013: c47.615,28.751 r0.35
  circle w0.013: c47.615,27.481 r0.35
  circle w0.013: c47.615,26.211 r0.35
  circle w0.013: c48.885,26.211 r0.35
  circle w0.013: c48.885,27.481 r0.35
  circle w0.013: c48.885,28.751 r0.35
  circle w0.013: c48.885,30.021 r0.35
  circle w0.013: c47.615,24.941 r0.35
  circle w0.013: c47.615,30.021 r0.35
  circle w0.013: c13.21,32.806 r0.545
  circle w0.013: c13.21,30.266 r0.545
  circle w0.013: c13.21,27.726 r0.545
  circle w0.013: c13.21,25.186 r0.545
  circle w0.013: c13.21,22.646 r0.545
  circle w0.013: c13.21,20.106 r0.545
  circle w0.013: c16.51,37.596 r0.545
  circle w0.013: c19.05,37.596 r0.545
  circle w0.013: c21.59,37.596 r0.545
  circle w0.013: c24.13,37.596 r0.545
  circle w0.013: c26.67,37.596 r0.545
  circle w0.013: c29.21,37.596 r0.545
  circle w0.013: c31.75,37.596 r0.545
  circle w0.013: c34.29,37.596 r0.545
  circle w0.013: c3.81,46.996 r1.219
  circle w0.013: c46.99,46.996 r1.219
  circle w0.013: c17.78,3.816 r0.45
  circle w0.013: c20.32,3.816 r0.45
  circle w0.013: c22.86,3.816 r0.45
  circle w0.013: c25.4,3.816 r0.45
  circle w0.013: c27.94,3.816 r0.45
  circle w0.013: c30.48,3.816 r0.45
  circle w0.013: c33.02,3.816 r0.45
  circle w0.013: c35.56,3.816 r0.45
  circle w0.013: c46.99,46.996 r2.286
  circle w0.013: c3.81,46.996 r2.286
  lines w0.013: 0,0.006 0,50.806 50.8,50.806 50.8,0.006 0,0.006
Mechanical 21:
  circle w0.013: c3.81,46.996 r1.219
  circle w0.013: c46.99,46.996 r1.219
  circle w0.013: c15.24,3.816 r0.45
  circle w0.013: c17.78,3.816 r0.45
  circle w0.013: c20.32,3.816 r0.45
  circle w0.013: c22.86,3.816 r0.45
  circle w0.013: c25.4,3.816 r0.45
  circle w0.013: c27.94,3.816 r0.45
  circle w0.013: c30.48,3.816 r0.45
  circle w0.013: c33.02,3.816 r0.45
  circle w0.013: c46.99,46.996 r2.286
  circle w0.013: c3.81,46.996 r2.286
  lines w0.013: 0,0.006 0,50.806 50.8,50.806 50.8,0.006 0,0.006
Mechanical 22:
  circle w0.013: c48.885,24.941 r0.35
  circle w0.013: c47.615,28.751 r0.35
  circle w0.013: c47.615,27.481 r0.35
  circle w0.013: c47.615,26.211 r0.35
  circle w0.013: c48.885,26.211 r0.35
  circle w0.013: c48.885,27.481 r0.35
  circle w0.013: c48.885,28.751 r0.35
  circle w0.013: c48.885,30.021 r0.35
  circle w0.013: c47.615,24.941 r0.35
  circle w0.013: c47.615,30.021 r0.35
  circle w0.013: c13.21,32.806 r0.545
  circle w0.013: c13.21,30.266 r0.545
  circle w0.013: c13.21,27.726 r0.545
  circle w0.013: c13.21,25.186 r0.545
  circle w0.013: c13.21,22.646 r0.545
  circle w0.013: c13.21,20.106 r0.545
  circle w0.013: c16.51,37.596 r0.545
  circle w0.013: c19.05,37.596 r0.545
  circle w0.013: c21.59,37.596 r0.545
  circle w0.013: c24.13,37.596 r0.545
  circle w0.013: c26.67,37.596 r0.545
  circle w0.013: c29.21,37.596 r0.545
  circle w0.013: c31.75,37.596 r0.545
  circle w0.013: c34.29,37.596 r0.545
  circle w0.013: c3.81,46.996 r1.219
  circle w0.013: c46.99,46.996 r1.219
  circle w0.013: c15.24,3.816 r0.45
  circle w0.013: c17.78,3.816 r0.45
  circle w0.013: c20.32,3.816 r0.45
  circle w0.013: c22.86,3.816 r0.45
  circle w0.013: c25.4,3.816 r0.45
  circle w0.013: c27.94,3.816 r0.45
  circle w0.013: c30.48,3.816 r0.45
  circle w0.013: c33.02,3.816 r0.45
  circle w0.013: c46.99,46.996 r2.286
  circle w0.013: c3.81,46.996 r2.286
  lines w0.013: 0,0.006 0,50.806 50.8,50.806 50.8,0.006 0,0.006
Mechanical 23:
  circle w0.013: c3.81,46.996 r1.219
  circle w0.013: c46.99,46.996 r1.219
  circle w0.013: c15.24,3.816 r0.45
  circle w0.013: c17.78,3.816 r0.45
  circle w0.013: c20.32,3.816 r0.45
  circle w0.013: c22.86,3.816 r0.45
  circle w0.013: c25.4,3.816 r0.45
  circle w0.013: c27.94,3.816 r0.45
  circle w0.013: c30.48,3.816 r0.45
  circle w0.013: c33.02,3.816 r0.45
  circle w0.013: c46.99,46.996 r2.286
  circle w0.013: c3.81,46.996 r2.286
  lines w0.013: 0,0.006 0,50.806 50.8,50.806 50.8,0.006 0,0.006
Mechanical 24:
  circle w0.013: c3.81,46.996 r1.219
  circle w0.013: c46.99,46.996 r1.219
  lines w0.013: 0,0.006 0,50.806 50.8,50.806 50.8,0.006 0,0.006
  lines w0.254: 0,0.006 50.8,0.006 50.8,50.806 0,50.806 0,0.006
Mechanical 25:
  lines w0.013: 0,0.006 50.8,0.006 50.8,50.806 0,50.806 0,0.006
Mechanical 26:
  lines w0.013: 0,0.006 0,50.806 50.8,50.806 50.8,0.006 0,0.006

## Text inside footprints (layer, text, board x,y; h text height)
U1: Bottom Overlay "*" at 41.275,27.311 h1.27; Mechanical 7 "Default Horiz Padstyle: RX11Y58D0T" at 45.72,13.926 h1.27; Mechanical 7 "Default Vert Padstyle: RX11Y58D0T" at 45.402,12.402 h1.27; Mechanical 7 "Heat Tab Padstyle: RX138Y138D0T" at 44.767,10.878 h1.27; Mechanical 7 "Alt 1 Padstyle: OX60Y90D30P" at 43.497,7.83 h1.27; Mechanical 7 "Alt 2 Padstyle: OX90Y60D30P" at 43.497,6.306 h1.27; Mechanical 7 "1.968504E-02in/0.5mm" at 27.381,26.954 h0.64; Mechanical 7 "0.03in/0.762mm" at 33.033,32.315 h0.64; Mechanical 7 "0.354in/8.992mm" at 37.306,34.22 h0.64; Mechanical 7 "0.354in/8.992mm" at 25.476,24.454 h0.64; Mechanical 13 "*" at 40.729,27.517 h1.27